# EAGLE board TPA3116AudioAmplifier (EAGLE 9.6.2)
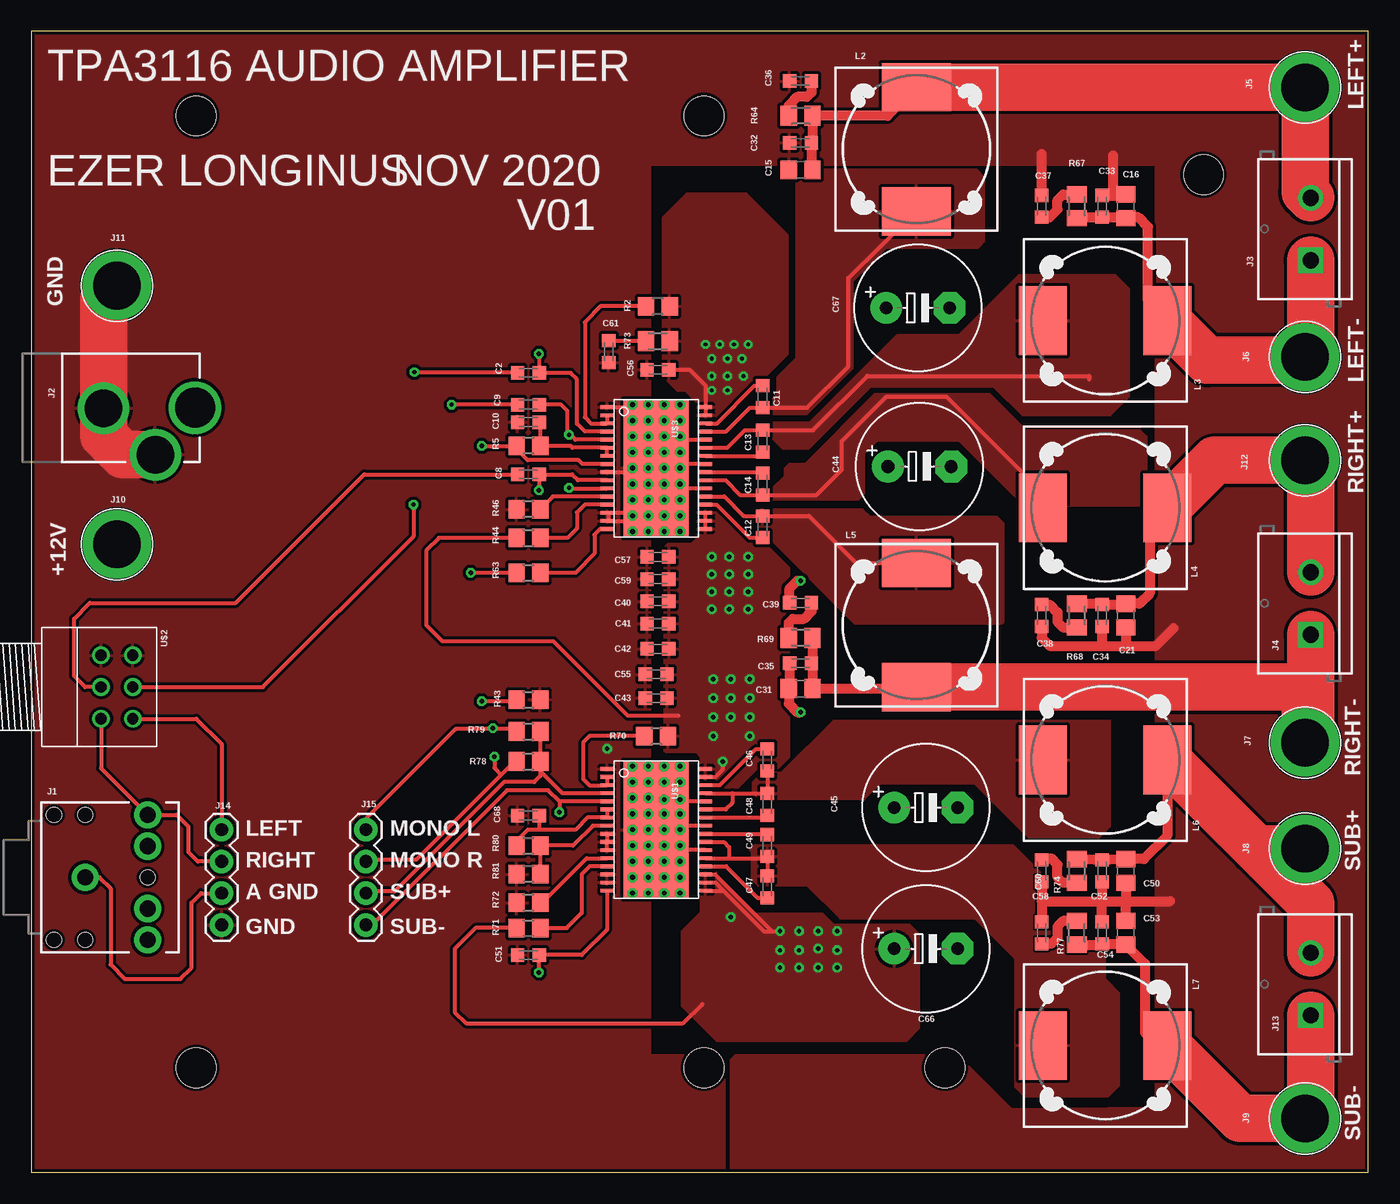
[diagram p0: board, top side]
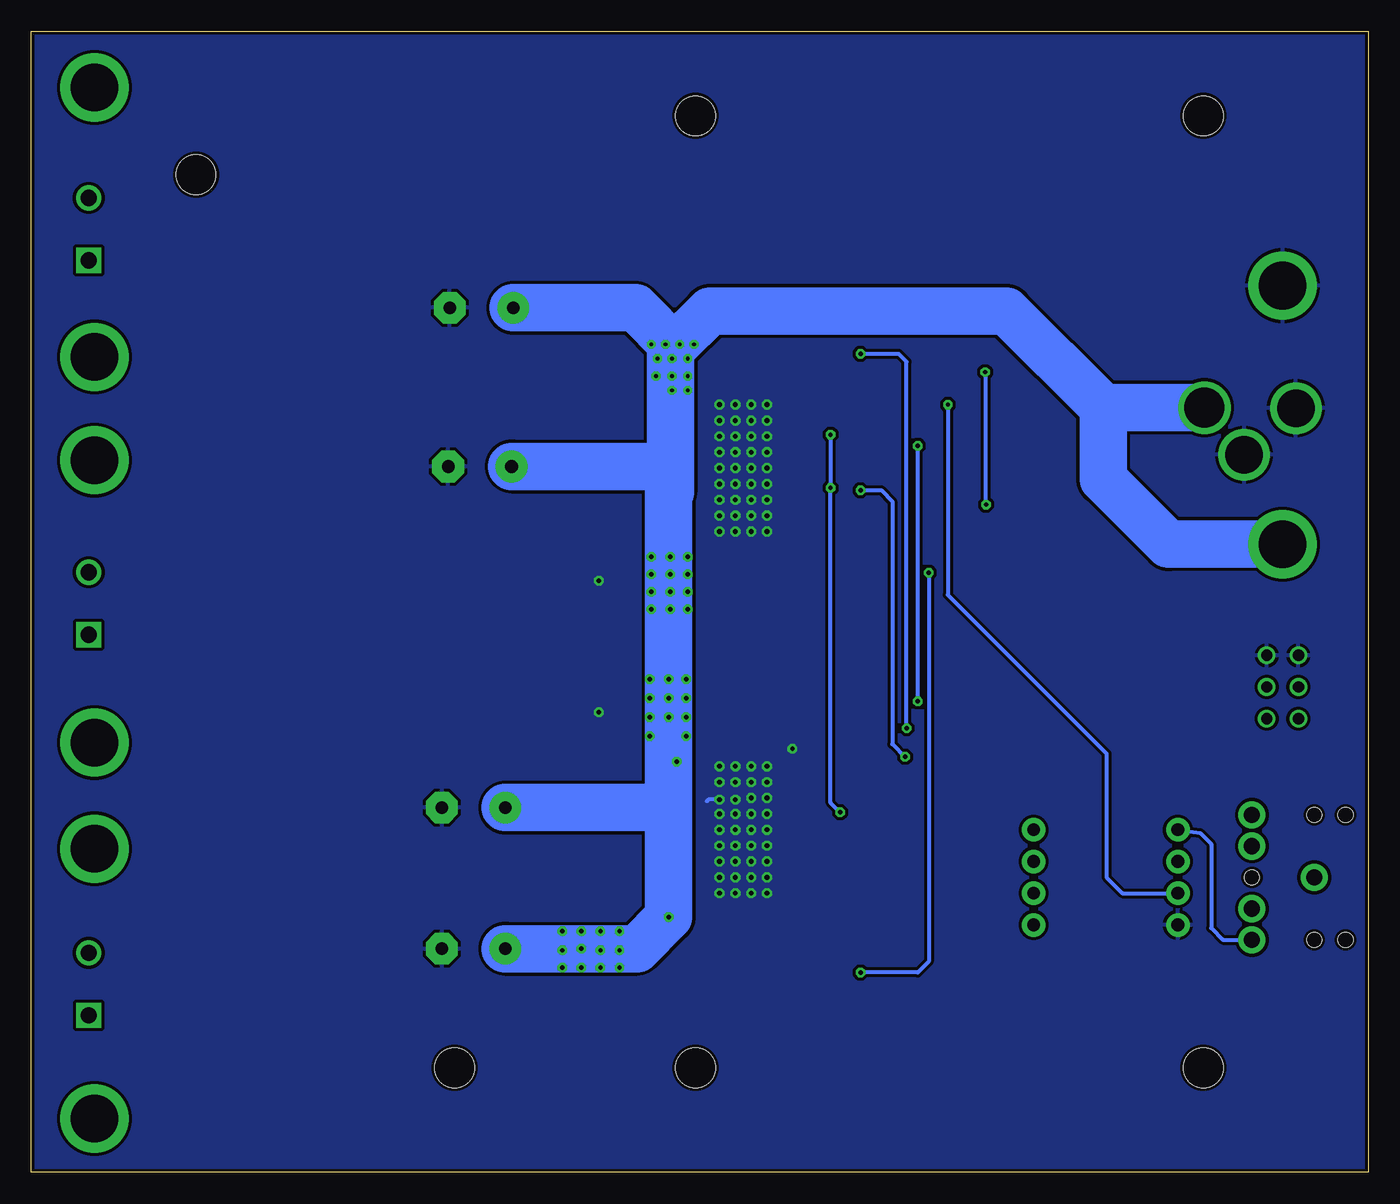
[diagram p1: board, bottom side, seen from below]

Size 107.04 x 91.36 mm. Coordinates in mm from the lower left corner, seen from the top.
Outline: 0,0 107.04,0 107.04,91.36 0,91.36 0,0
Copper layers (1*16): Top 0.035mm / dielectric 1.5mm / Bottom 0.035mm
Design rules "default *": minimum track width 6mil, minimum drill 12mil, track to track 6mil, track to pad 6mil, pad to pad 6mil, via to via 6mil, smd to smd 6mil, copper to edge 10mil, drill to drill 6mil, minimum pad ring 10mil, minimum via ring 8mil, stop-mask expansion 13mil, vias tented up to drill 0mil, thermal gap 10mil
Holes 3.17 mm at 13.21,8.38 13.21,84.58 73.15,8.38 93.85,79.88 53.85,84.58 53.85,8.38

## Footprints (pad centres in the part's own frame; a part is rotated, then mirrored left to right if it is on the bottom)
C0603K = smd 1.05 x 1.08: 1 -0.875,0; 2 0.875,0
C0805 = smd 1.3 x 1.5: 1 -0.95,0; 2 0.95,0
E5-10,5 = drill 1.016 pad 2.54: + -2.54,0 | drill 1.016 pad 2.54 octagon: - 2.54,0
AUDIO-JACK = drill 1.3 pad 2.184: RING 5,5; RSH 5,2.5; SLEEVE 0,0; TIP 5,-5; TSH 5,-2.5 | hole 1.2: 0,5; -2.5,5; -2.5,-5; 0,-5; 5,0
POWER_JACK_PTH_LOCK = drill 2.997 pad 4.115: GND 0.025,6.557; GNDBREAK 3.762,10.7 | drill 3.2 pad 4.115: PWR 0,13.878
SCREWTERMINAL-5MM-2 = drill 1.3 pad 2.032 square: 1 0,0 | drill 1.3 pad 2.032: 2 5,0
BANANA_CONN = drill 3.81 pad 5.461: P$1 0,0
1X04 = drill 1.016 pad 1.88: 1 0,0; 2 2.54,0; 3 5.08,0; 4 7.62,0
DR125 = smd 3.85 x 5.5: 1 -4.975,0; 2 4.975,0
R0805 = smd 1.3 x 1.5: 1 -0.95,0; 2 0.95,0
M0805 = smd 1.3 x 1.6: 1 -0.95,0; 2 0.95,0
HTSSOP32DAP = smd 0.3 x 1: 1 -4.875,-3.95; 2 -4.225,-3.95; 3 -3.575,-3.95; 4 -2.925,-3.95; 5 -2.275,-3.95; 6 -1.625,-3.95; 7 -0.975,-3.95; 8 -0.325,-3.95; 9 0.325,-3.95; 10 0.975,-3.95; 11 1.625,-3.95; 12 2.275,-3.95; 13 2.925,-3.95; 14 3.575,-3.95; 15 4.225,-3.95; 16 4.875,-3.95; 17 4.875,3.95; 18 4.225,3.95; 19 3.575,3.95; 20 2.925,3.95; 21 2.275,3.95; 22 1.625,3.95; 23 0.975,3.95; 24 0.325,3.95; 25 -0.325,3.95; 26 -0.975,3.95; 27 -1.625,3.95; 28 -2.275,3.95; 29 -2.925,3.95; 30 -3.575,3.95; 31 -4.225,3.95; 32 -4.875,3.95 | smd 11 x 5.2: EXP 0,0
DUAL_POT_H = drill 0.9: 1 -2.54,1.27; 2 0,1.27; 3 2.54,1.27; 4 -2.54,-1.27; 5 0,-1.27; 6 2.54,-1.27

## Placement (x,y rotation side)
C2  1uF  [C0603K]  39.8,64.01 0 top
C8  1uF  [C0603K]  39.8,55.88 0 top
C9  1uF  [C0603K]  39.8,61.47 0 top
C10  1uF  [C0603K]  39.8,60.07 180 top
C11  1uF  [C0603K]  58.55,62.1 270 top
C12  1uF  [C0603K]  58.55,51.69 90 top
C13  1uF  [C0603K]  58.55,58.55 90 top
C14  1uF  [C0603K]  58.55,55.12 270 top
C15  680nF  [C0805]  61.59,80.26 180 top
C16  680nF  [C0805]  87.63,77.34 270 top
C21  680nF  [C0805]  87.63,44.58 270 top
C31  680nF  [C0805]  61.59,38.73 0 top
C32  1nF  [C0603K]  61.59,82.42 180 top
C33  1nF  [C0603K]  85.72,77.34 270 top
C34  1nF  [C0603K]  85.72,44.58 270 top
C35  1nF  [C0603K]  61.59,40.77 0 top
C36  10nF  [C0603K]  61.59,87.38 180 top
C37  10nF  [C0603K]  80.9,77.34 270 top
C38  10nF  [C0603K]  80.9,44.58 270 top
C39  10nF  [C0603K]  61.59,45.59 0 top
C40  1nF  [C0603K]  50.16,45.72 180 top
C41  1nF  [C0603K]  50.16,43.94 180 top
C42  0.1uF  [C0603K]  50.16,41.91 180 top
C43  0.1uF  [C0603K]  50.04,37.97 180 top
C44  220uF  [E5-10,5]  71.12,56.52 0 top
C45  220uF  [E5-10,5]  71.63,29.21 0 top
C46  1uF  [C0603K]  58.93,33.02 270 top
C47  1uF  [C0603K]  58.93,22.86 90 top
C48  1uF  [C0603K]  58.93,29.46 90 top
C49  1uF  [C0603K]  58.93,26.16 270 top
C50  680nF  [C0805]  87.63,24.13 270 top
C51  1uF  [C0603K]  39.8,17.4 180 top
C52  1nF  [C0603K]  85.72,24.13 270 top
C53  680nF  [C0805]  87.63,19.18 270 top
C54  1nF  [C0603K]  85.72,19.18 270 top
C55  0.1uF  [C0603K]  50.04,39.88 180 top
C56  0.1uF  [C0603K]  50.16,64.26 180 top
C57  1nF  [C0603K]  50.16,49.28 180 top
C58  10nF  [C0603K]  80.9,24.13 270 top
C59  1nF  [C0603K]  50.16,47.5 180 top
C60  10nF  [C0603K]  80.9,19.18 270 top
C61  0.1uF  [C0603K]  46.23,65.7 270 top
C66  220uF  [E5-10,5]  71.63,17.91 0 top
C67  220uF  [E5-10,5]  70.99,69.22 0 top
C68  1uF  [C0603K]  39.8,28.57 180 top
J1  AUDIO_JACK_3.5MM_PTH  [AUDIO-JACK]  4.32,23.62 0 top
J2  POWER_JACKPTH_LOCK  [POWER_JACK_PTH_LOCK]  -0.76,61.21 270 top
J3  LEFT  [SCREWTERMINAL-5MM-2]  102.44,73.03 90 top
J4  RIGHT  [SCREWTERMINAL-5MM-2]  102.44,43.05 90 top
J5  LEFT+  [BANANA_CONN]  101.98,86.87 0 top
J6  LEFT-  [BANANA_CONN]  101.98,65.28 0 top
J7  RIGHT-  [BANANA_CONN]  101.98,34.42 0 top
J8  SUB+  [BANANA_CONN]  101.98,25.91 0 top
J9  SUB-  [BANANA_CONN]  101.98,4.32 0 top
J10  +12V  [BANANA_CONN]  6.86,50.29 0 top
J11  GNd  [BANANA_CONN]  6.86,70.99 0 top
J12  RIGHT+  [BANANA_CONN]  101.98,57.02 0 top
J13  SUB  [SCREWTERMINAL-5MM-2]  102.44,12.57 90 top
J14  AUDIO_IN  [1X04]  15.24,27.43 270 top
J15  SUB_IN  [1X04]  26.8,27.43 270 top
L2  10uH  [DR125]  70.87,81.92 90 top
L3  10uH  [DR125]  85.98,68.2 0 top
L4  10uH  [DR125]  85.98,53.21 0 top
L5  10uH  [DR125]  70.87,43.81 270 top
L6  10uH  [DR125]  85.98,33.02 0 top
L7  10uH  [DR125]  85.98,10.16 0 top
R2  100k  [R0805]  50.16,69.34 180 top
R5  100k  [R0805]  39.8,58.17 180 top
R43  20k  [R0805]  39.8,37.85 0 top
R44  100k  [R0805]  39.8,50.8 0 top
R46  100k  [R0805]  39.8,53.09 180 top
R63  47k  [R0805]  39.8,48.01 0 top
R64  3.3  [M0805]  61.59,84.58 0 top
R67  3.3  [M0805]  83.69,77.34 90 top
R68  3.3  [M0805]  83.69,44.58 90 top
R69  3.3  [M0805]  61.59,42.8 0 top
R70  100k  [R0805]  50.04,34.92 180 top
R71  100k  [R0805]  39.8,19.56 0 top
R72  100k  [R0805]  39.8,21.59 180 top
R73  3.3  [M0805]  50.16,66.55 180 top
R74  3.3  [M0805]  83.69,24.13 90 top
R77  3.3  [M0805]  83.69,19.18 270 top
R78  470  [R0805]  39.8,32.89 0 top
R79  470  [R0805]  39.8,35.31 0 top
R80  47k  [R0805]  39.8,26.16 0 top
R81  75k  [R0805]  39.8,23.88 180 top
U$1  TPA3116HTSSOP32  [HTSSOP32DAP]  50.04,27.43 270 top
U$2  DUAL_POT_H  [DUAL_POT_H]  6.86,38.86 270 top
U$3  TPA3116HTSSOP32  [HTSSOP32DAP]  50.04,56.39 270 top

## Library data of the parts
C2 C8-C16 C21 C31-C61 C66-C68 = rcl; SPICEPREFIX: C
J1 = SparkFun-Connectors; PROD_ID: CONN-08774; SF_ID: PRT-08032
J2 = SparkFun-Connectors; PROD_ID: CONN-08197; SF_ID: PRT-00119
J3 J4 J13 = SparkFun-Connectors; SF_SKU: PRT-08432
J5-J12 = SparkFun-Connectors
J14 J15 = SparkFun-Connectors; PROD_ID: CONN-09696
L2-L7 = inductors; SPICEPREFIX: L
R2 R5 R43 R44 R46 R63 R64 R67-R74 R77-R81 = rcl; SPICEPREFIX: R
U$1-U$3 = EzerLonginus

## Nets
+12V: C40.1 C41.1 C42.1 C43.1 C44.+ C45.+ C55.1 C56.1 C57.1 C59.1 C66.+ C67.+ J2.PWR J10.P$1 R2.1 R44.1 R70.1 R71.1 R73.1 U$1.17 U$1.18 U$1.19 U$1.31 U$1.32 U$3.17 U$3.18 U$3.19 U$3.31 U$3.32
AUDIO_GND: C9.1 J1.SLEEVE J14.3
GND: C10.2 C15.2 C16.1 C21.2 C31.1 C32.2 C33.1 C34.2 C35.1 C36.2 C37.1 C38.2 C39.1 C40.2 C41.2 C42.2 C43.2 C44.- C45.- C50.2 C51.2 C52.2 C53.1 C54.1 C55.2 C56.2 C57.2 C58.2 C59.2 C60.1 C61.2 C66.- C67.- C68.2 J2.GND J2.GNDBREAK J11.P$1 J14.4 R43.2 R46.2 R72.2 R81.2 U$1.1 U$1.9 U$1.10 U$1.11 U$1.14 U$1.15 U$1.22 U$1.25 U$1.28 U$1.EXP U$2.1 U$2.4 U$3.1 U$3.9 U$3.14 U$3.15 U$3.22 U$3.25 U$3.28 U$3.EXP
LEFT+: C15.1 C32.1 J3.2 J5.P$1 L2.2 R64.2
LEFT-: C16.2 C33.2 J3.1 J6.P$1 L3.2 R67.1
LEFT_IN: J1.TIP J14.1 U$2.3
LOUTN: C13.2 L3.1 U$3.27
LOUTP: C11.2 L2.1 U$3.29
MONO_L: C2.2 J15.1 R79.1 U$3.4
MONO_R: C8.2 J15.2 R78.1 U$3.10
N$2: C8.1 U$2.5
N$4: R70.2 U$1.2 U$1.3
N$13: C61.1 R73.2
N$14: R2.2 U$3.2 U$3.3
N$15: R44.2 U$3.13
N$17: R46.1 U$3.12
N$18: R5.2 R43.1 U$3.8
N$20: C2.1 U$2.2
N$21: R80.2 R81.1 U$1.8
N$22: C10.1 R5.1 U$3.6 U$3.7
N$60: R63.2 U$3.16
N$64: C11.1 U$3.30
N$66: C12.1 U$3.20
N$70: C13.1 U$3.26
N$71: C14.1 U$3.24
N$73: C68.1 R80.1 U$1.6 U$1.7
N$75: R71.2 U$1.13
N$76: C36.1 R64.1
N$77: R72.1 U$1.12
N$78: C38.1 R68.1
N$80: C37.2 R67.2
N$81: C39.2 R69.1
N$83: C46.1 U$1.30
N$85: C47.1 U$1.20
N$87: C48.1 U$1.26
N$88: C49.1 U$1.24
N$91: C58.1 R74.1
N$94: C60.2 R77.1
RIGHT+: C21.1 C34.1 J4.2 J12.P$1 L4.2 R68.2
RIGHT-: C31.2 C35.2 J4.1 J7.P$1 L5.2 R69.2
RIGHT_IN: J1.RING J14.2 U$2.6
ROUTN: C12.2 L5.1 U$3.21
ROUTP: C14.2 L4.1 U$3.23
SOUTN: C47.2 C49.2 L7.1 U$1.21 U$1.23
SOUTP: C46.2 C48.2 L6.1 U$1.27 U$1.29
SUB+: C50.1 C52.1 J8.P$1 J13.2 L6.2 R74.2
SUB-: C53.2 C54.2 J9.P$1 J13.1 L7.2 R77.2
SUB_NEG: C9.2 J15.4 U$1.5 U$3.5 U$3.11
SUB_POS: J15.3 R78.2 R79.2 U$1.4
SYNC: C51.1 R63.1 U$1.16

## Tracks (layer width: path | path; a pad name or v marks a point on that pad's centre or on a via)
+12V  (via drill 0.3, 0.35)
  Top 0.305: U$3.31 U$3.32 53.99,62.98 52.7,64.26 C56.1 | U$3.19 U$3.18 U$3.17 | R44.1 32.64,50.8 31.62,49.78 31.62,43.81 32.89,42.55 41.78,42.55 47.75,36.58 51.82,36.58 | R71.1 35.56,19.56 33.91,17.91 33.91,12.83 34.8,11.94 52.2,11.94 53.72,13.46 | U$1.17 55.42,22.56 | 55.42,22.56 58.67,19.3 v59.94,19.3 59.31,19.3 54.76,23.86 U$1.19 | U$1.18 54.77,23.21 55.42,22.56 | U$1.31 54.77,31.66 55.37,32.26 v55.37,32.89
  Bottom 0.305: v57.4,66.29 60.33,69.22 C67.+ | v56.01,20.45 55.37,21.08 v55.37,32.89
  Bottom 3.81: J2.PWR 21.21,61.21 | 55.56,66.1 52.7,68.96 28.96,68.96 21.21,61.21 | 55.56,66.1 55.88,65.79 55.88,54.48 56.01,54.48 | C66.+ 58.55,17.91 v56.01,20.45 56.01,29.55 | 56.01,54.48 56.01,56.52 C44.+ | 56.01,54.48 56.01,29.55 | J10.P$1 16,50.29 21.21,55.5 21.21,61.21 | C45.+ 57.91,29.21 56.01,29.55 | C67.+ 58.67,69.22 55.56,66.1
  other vias: 53.98,66.29 55.12,66.29 56.26,66.29 54.48,62.61 55.75,62.61 54.48,65.15 55.75,65.15 56.9,65.15 54.48,63.75 55.75,63.75 57.02,63.75 54.48,49.28 55.88,49.28 57.4,49.28 54.48,47.88 55.88,47.88 57.4,47.88 54.48,46.48 55.88,46.48 57.4,46.48 54.48,45.09 55.88,45.09 57.4,45.09 59.94,16.38 59.94,17.78 61.47,16.38 61.47,17.78 61.47,19.3 62.99,19.3 62.99,17.91 62.99,16.38 64.52,16.38 64.52,17.78 64.52,19.3 54.61,39.5 56.01,39.5 57.53,39.5 54.61,37.97 56.01,37.97 57.53,37.97 54.61,36.45 56.01,36.45 57.53,36.45 54.61,34.92 57.53,34.92
  pour Top (isolate 0.254): 50.67,50.04 50.67,33.78 50.8,33.66 53.21,33.66 53.59,33.27 53.59,20.83 52.07,19.3 52.07,13.34 54.86,10.54 70.1,10.54 71.12,11.56 71.12,19.05 70.36,19.81 64.26,19.81 63.37,20.7 57.91,20.7 54.86,23.75 54.86,29.08 58.17,32.38 59.82,32.38 60.71,33.27 60.71,48.39 58.04,51.05 56.77,51.05 54.48,53.34 54.48,59.44 60.58,65.53 60.58,75.06 57.28,78.36 52.45,78.36 50.55,76.45 50.55,63.75 51.69,62.61 52.32,62.61 53.34,61.59 53.34,50.8 52.83,50.29 50.93,50.29
AUDIO_GND  (via drill 0.35)
  Top 0.305: J1.SLEEVE 5.46,23.62 6.35,22.73 6.35,16.64 7.49,15.49 11.94,15.49 12.83,16.38 12.83,21.59 13.59,22.35 J14.3 | C9.1 v33.66,61.47
  Bottom 0.305: v33.66,61.47 33.66,46.23 20.95,33.53 20.95,23.62 19.68,22.35 J14.3
GND  (via drill 0.35, 0.38)
  Top 0.305: U$3.9 48.84,56.06 48.9,56.01 49.66,56.01 U$3.EXP | 49.53,52.83 49.51,52.81 U$3.14 46.23,52.67 46.23,52.16 | U$3.15 46.23,52.16 | 46.23,52.16 50,52.16 50.04,52.2 | U$3.1 49.1,61.26 49.28,61.09 | 50.04,32.38 49.96,32.31 50.04,32.23 U$1.EXP | U$1.11 U$1.10 U$1.9 | U$3.28 51.42,58.66 50.04,57.28 U$3.EXP | 50.04,61.21 49.96,61.14 49.96,56.47 U$3.EXP | U$3.25 52.51,56.71 | 52.51,56.71 52.45,56.77 | U$3.22 52.6,54.76 52.45,54.61 v50.67,56.39 | U$1.25 52.27,27.76 v51.94,27.43 | U$1.22 52.48,25.81 52.45,25.78 50.8,27.43 U$1.EXP | U$1.28 52.08,29.71 v51.94,29.84 | U$1.EXP v50.67,27.43 v51.94,26.16 | v50.67,56.39 v51.94,56.39 52.18,56.39 52.51,56.71 | v50.67,56.39 v51.94,55.12 | U$3.EXP v50.67,56.39 | U$3.EXP 50.04,56.52 | U$3.EXP 50.04,57.02 v51.94,58.93
  Top 0.813: C58.2 80.9,21.72 | 80.9,21.72 C60.1 | C52.2 85.72,21.72 | C54.1 85.72,21.72 | C50.2 87.63,21.72 | C53.1 87.63,21.72 | 80.9,21.72 85.72,21.72 | 85.72,21.72 87.63,21.72 | 87.63,21.72 91.19,21.72 | C38.2 80.9,42.8 81.53,42.16 85.72,42.16 | 85.72,42.16 87.63,42.16 | 87.63,42.16 90.04,42.16 91.44,43.56 | C21.2 87.63,42.16 | C34.2 85.72,42.16 | C37.1 80.9,81.53 | C33.1 86.61,78.22 | 86.61,78.22 87.56,78.22 C16.1 | 86.61,78.22 86.61,81.41 | C35.1 60.72,38.81 C31.1 60.65,37.53 61.34,36.83 v61.59,36.83 | C39.1 60.72,46.75 61.34,47.37 v61.59,47.37
  Top 3.81: J2.GNDBREAK 7.32,57.45 5.79,58.98 J2.GND 5.79,69.93 J11.P$1
  Bottom 0.305: v51.94,29.84 52.83,29.84 52.96,29.72
  other vias: 48.13,32.51 49.4,32.51 50.67,32.51 51.94,32.51 48.13,31.24 49.4,31.24 48.13,29.97 49.4,29.97 50.67,31.24 51.94,31.24 50.67,29.84 48.13,28.7 49.4,28.7 50.67,28.7 51.94,28.7 48.13,27.43 49.4,27.43 48.13,26.16 49.4,26.16 50.67,26.16 48.13,24.89 49.4,24.89 48.13,23.62 49.4,23.62 48.13,22.35 49.4,22.35 50.67,24.89 51.94,24.89 50.67,23.62 51.94,23.62 50.67,22.35 51.94,22.35 48.13,61.47 49.4,61.47 50.67,61.47 51.94,61.47 48.13,60.2 49.4,60.2 48.13,58.93 49.4,58.93 50.67,60.2 51.94,60.2 50.67,58.93 48.13,57.66 49.4,57.66 50.67,57.66 51.94,57.66 48.13,56.39 49.4,56.39 48.13,55.12 49.4,55.12 48.13,53.85 49.4,53.85 50.67,55.12 50.67,53.85 51.94,53.85 48.13,52.58 49.4,52.58 50.67,52.58 51.94,52.58 48.13,51.31 49.4,51.31 50.67,51.31 51.94,51.31 46.1,33.91
  pour Top (isolate 0.254): -0.13,91.41 107.31,91.41 107.31,-0.13 56.01,-0.13 56.01,9.02 56.39,9.4 74.17,9.4 78.49,5.08 90.04,5.21 90.04,80.64 49.53,80.64 49.53,9.4 55.5,9.4 55.5,0 -0.13,0
  pour Bottom (isolate 0.254): 0.13,91.31 107.44,91.31 107.44,0.13 0.13,0.13
LEFT+
  Top 0.813: C15.1 62.47,80.34 C32.1 62.55,82.5 R64.2 68.56,84.58 L2.2
  Top 3.81: L2.2 70.76,86.87 J5.P$1 101.98,78.47 J3.2
LEFT-
  Top 0.305: J6.P$1 101.98,72.58 J3.1
  Top 0.813: R67.1 83.77,76.47 C33.2 87.56,76.47 | 87.56,76.47 C16.2 | L3.2 89.41,69.75 89.41,75.69 88.63,76.47 87.56,76.47
  Top 3.81: L3.2 94.13,65.02 102.62,65.02 102.44,65.2 J3.1
LEFT_IN
  Top 0.305: U$2.3 13.21,36.32 15.24,34.29 J14.1
  Bottom 0.305: J14.1 13.46,27.18 12.57,26.29 12.57,19.56 11.64,18.62 J1.TIP
LOUTN
  Top 0.305: U$3.27 55.73,58.01 57.14,59.42 C13.2 62.6,59.42 66.93,63.75 84.71,63.75 84.71,63.5
  pour Top (isolate 0.254): 79.12,71.88 86.74,71.88 87.88,70.74 87.88,62.1 86.36,60.58 79.38,60.58 77.09,62.87 67.18,62.87 62.23,57.91 60.2,57.91 58.8,59.31 58.8,59.44 59.44,60.07 62.36,60.07 69.34,67.06 74.3,67.06
LOUTP
  Top 0.305: U$3.29 55.63,59.31 57.55,61.23 C11.2 62.12,61.23 65.41,64.52 65.41,71.61 L2.1
  pour Top (isolate 0.254): 76.33,74.55 76.33,79.63 75.69,80.26 62.1,80.26 61.21,79.38 61.21,65.15 59.69,63.63 59.69,62.23 59.31,61.85 59.31,61.59 58.67,61.59 58.67,60.71 62.1,60.71 65.79,64.39 65.79,71.37 68.45,74.04 75.82,74.04
MONO_L  (via drill 0.35)
  Top 0.305: U$3.4 44.32,59.31 43.69,59.94 43.69,63.5 43.18,64.01 C2.2 40.67,65.5 v40.64,65.53 | R79.1 38.65,35.5 36.9,35.5 | 36.9,35.5 33.98,35.5 26.8,28.32 J15.1 | 36.9,35.5 v36.96,35.56
  Bottom 0.305: v40.64,65.53 37.59,65.53 36.96,64.9 v36.96,35.56
MONO_R  (via drill 0.35)
  Top 0.305: U$3.10 43.77,55.41 43.31,55.88 C8.2 40.67,54.77 40.64,54.74 v40.64,54.61 | 37.63,31.84 38.69,32.89 R78.1 38.85,33.04 38.61,33.27 | 37.63,31.84 30.82,25.02 26.92,25.02 J15.2 | v37.08,33.27 37.08,32.38 37.63,31.84
  Bottom 0.305: v40.64,54.61 38.99,54.61 38.1,53.72 38.1,34.29 v37.08,33.27
N$2
  Top 0.305: U$2.5 4.32,38.86 3.43,39.75 3.43,44.32 4.7,45.59 16.38,45.59 26.67,55.88 C8.1
N$4
  Top 0.305: U$1.2 U$1.3 46.07,30.99 44.7,30.99 44.2,31.5 44.2,34.42 44.7,34.92 R70.2
N$13
  Top 0.305: R73.2 46.26,66.55 C61.1
N$14
  Top 0.305: U$3.2 U$3.3 44.81,59.96 44.32,60.45 44.32,68.07 45.59,69.34 R2.2
N$15
  Top 0.305: U$3.13 44.32,53.46 43.69,52.83 43.69,51.56 42.93,50.8 R44.2
N$17
  Top 0.305: U$3.12 41.77,54.11 R46.1
N$18  (via drill 0.35)
  Top 0.305: U$3.8 44.12,56.71 43.81,57.02 39.75,57.02 38.85,57.93 R5.2 v36.07,58.17 | R43.1 38.72,37.72 v36.07,37.72
  Bottom 0.305: v36.07,37.72 v36.07,58.17
N$20  (via drill 0.35)
  Top 0.305: U$2.2 18.54,38.86 30.61,50.93 v30.61,53.47 | v30.67,64.07 38.86,64.07 C2.1
  Bottom 0.305: v30.61,53.47 30.61,63.88 30.73,64.01 v30.67,64.07
N$21
  Top 0.305: U$1.8 44.96,27.76 43.37,26.16 R80.2 R81.1
N$22
  Top 0.305: U$3.7 U$3.6 43.33,58.01 43.18,58.17 R5.1 40.75,60 C10.1
N$60
  Top 0.305: U$3.16 45.54,51.51 45.09,51.05 45.09,49.53 43.56,48.01 R63.2
N$64
  Top 0.305: U$3.30 54.88,59.96 57.9,62.98 C11.1
N$66
  Top 0.305: U$3.20 54.87,53.46 57.52,50.81 C12.1
N$70
  Top 0.305: U$3.26 58.24,57.36 C13.1
N$71
  Top 0.305: U$3.24 58.48,56.06 C14.1
N$73
  Top 0.305: U$1.6 U$1.7 44.54,28.41 43.56,27.43 40.77,27.43 | R80.1 38.85,26.53 39.75,27.43 40.77,27.43 | C68.1 40.67,27.53 40.77,27.43
N$75
  Top 0.305: U$1.13 44.7,24.51 44.07,23.88 44.07,20.77 42.86,19.56 R71.2
N$76
  Top 0.813: C36.1 62.47,86.47 62.1,86.11 61.34,86.11 60.65,85.41 R64.1
N$77
  Top 0.305: R72.1 40.93,21.78 41.08,21.78 44.46,25.16 U$1.12
N$78
  Top 0.813: C38.1 81.55,45.45 82.17,44.83 82.17,44.07 82.61,43.63 R68.1
N$80
  Top 0.813: C37.2 81.55,76.47 82.17,77.09 82.17,77.85 82.61,78.29 R67.2
N$81
  Top 0.813: R69.1 60.65,44.01 60.96,44.32 61.85,44.32 62.47,44.94 C39.2
N$83
  Top 0.305: U$1.30 55.14,31.01 58.02,33.9 C46.1
N$85
  Top 0.305: U$1.20 55.63,24.51 58.15,21.98 C47.1
N$87
  Top 0.305: U$1.26 58.75,28.41 C48.1
N$88
  Top 0.305: U$1.24 58.86,27.11 C49.1
N$91
  Top 0.813: R74.1 82.61,23.18 82.17,23.62 82.17,24.64 81.67,25.13 C58.1
N$94
  Top 0.813: R77.1 82.61,20.13 82.17,19.68 82.17,18.8 81.67,18.3 C60.2
RIGHT+
  Top 0.813: R68.2 85.65,45.53 C34.1 87.56,45.45 C21.1 88.71,45.53 89.53,46.35 89.53,51.79 L4.2
  Top 3.81: L4.2 94.76,57.02 J12.P$1 102.44,56.57 J4.2
RIGHT-
  Top 0.813: R69.2 62.55,40.84 C35.2 62.55,40.69 C31.2 70.76,38.73 L5.2
  Top 3.81: L5.2 70.89,38.86 101.98,38.86 J7.P$1 102.44,34.87 J4.1
RIGHT_IN
  Top 0.305: U$2.6 5.59,32.35 J1.RING 11.64,28.62 12.57,27.69 12.57,25.65 13.34,24.89 J14.2
ROUTN
  Top 0.305: U$3.21 55.49,54.11 57.04,52.56 C12.2 62.24,52.56 66.02,48.79 L5.1
  pour Top (isolate 0.254): 65.91,43.94 77.72,43.94 77.85,44.07 77.85,51.94 77.34,52.45 67.18,52.45 66.55,53.09 58.42,53.09 58.17,52.83 58.17,51.69
ROUTP
  Top 0.305: U$3.23 55.59,55.41 56.76,54.24 C14.2 62.88,54.24 64.9,56.26 64.9,58.55 68.45,62.1 73.28,62.1 80.51,54.87 L4.1
  pour Top (isolate 0.254): 88.65,53.34 79.5,53.34 74.3,58.55 67.69,58.55 66.67,57.53 66.67,54.36 66.17,53.85 58.55,53.85 58.29,54.1 58.29,54.48 58.55,54.74 59.31,54.74 60.33,55.75 60.33,56.39 60.71,56.77 61.98,56.77 67.56,62.36 76.71,62.36 79.63,59.44 88.77,59.44 89.28,58.93 89.28,53.98
SOUTN
  Top 0.305: U$1.21 55.88,25.16 | 55.88,25.16 58.8,25.16 C49.2 C47.2 | U$1.23 55.46,26.46 55.88,26.04 55.88,25.16
  pour Top: 57.66,25.78 57.66,23.5 58.17,22.99 62.1,22.99 64.77,20.32 75.56,20.32 78.74,17.14 78.74,6.86 79.5,6.1 86.23,6.1 87.12,6.99 87.12,14.35 85.98,15.49 85.98,18.8 78.61,26.16 57.91,26.16 57.53,25.78
SOUTP
  Top 0.305: U$1.29 56.13,30.36 | 56.13,30.36 58.91,30.36 | 58.91,30.36 C48.2 | C46.2 58.93,30.38 58.91,30.36 | 56.13,30.36 56.13,29.59 55.6,29.06 U$1.27
  pour Top: 64.26,36.2 86.36,36.2 86.36,27.69 85.47,26.8 79.88,26.8 75.56,31.11 67.94,31.11 66.67,29.84 58.29,29.84 57.78,30.35 57.78,31.24 58.55,32 60.07,32
SUB+
  Top 0.813: R74.2 83.75,25.13 C52.1 87.58,25.13 C50.1 89.09,25.08 90.95,26.95 L6.2
  Top 3.81: L6.2 98.07,25.91 | 98.07,25.91 J8.P$1 | J13.2 102.44,21.54 98.07,25.91
SUB-
  Top 0.813: R77.2 85.65,18.23 C54.2 87.56,18.3 C53.2 89.15,16.7 89.15,11.18 90.17,10.16 L7.2
  Top 3.81: L7.2 96.8,4.32 J9.P$1 102.44,4.77 J13.1
SUB_NEG  (via drill 0.35)
  Top 0.305: U$3.5 43.57,58.66 43.12,59.12 | C9.2 42.42,61.47 42.93,60.96 42.93,59.31 43.12,59.12 | J15.4 26.87,19.38 38.09,30.6 41.39,30.6 42.28,29.71 | U$1.5 42.28,29.71 | 42.28,29.71 42.28,28.97 42.29,28.96 v42.29,28.83 | v43.05,54.8 43.09,54.76 U$3.11 | v43.05,59.05 43.12,59.12
  Bottom 0.305: v42.29,28.83 43.05,29.59 v43.05,54.8 v43.05,59.05
SUB_POS
  Top 0.305: U$1.4 42.55,30.35 40.7,32.2 40.7,32.85 R78.2 | R79.2 R78.2 | R78.2 40.75,31.73 40.26,31.24 37.85,31.24 29.08,22.48 26.92,22.48 J15.3
SYNC  (via drill 0.35)
  Top 0.305: U$1.16 46.09,19.42 44.07,17.4 C51.1 40.64,17.37 v40.64,16 | R63.1 v35.18,48.01
  Bottom 0.305: v40.64,16 36.07,16 35.18,16.89 v35.18,48.01

## Text on the board
tPlace: TPA3116 AUDIO AMPLIFIER | LEFT+ | EZER LONGINUS | NOV 2020 | V01 | GND | LEFT- | RIGHT+ | +12V | RIGHT- | LEFT | MONO L | RIGHT | MONO R | SUB+ | A GND | SUB+ | GND | SUB- | SUB-